# Altium PCB 基于STM32的DDS信号源的设计实例.PcbDoc
Units mm, origin at the board's own origin, x right, y up, seen from the top; angles counter-clockwise.
Board outline 100 x 70 mm, 2 copper layers (Top Layer, Bottom Layer); 59 components, 57 nets, 247 pads, 23 vias.
Unrouted connection lines stored in the file: 1.
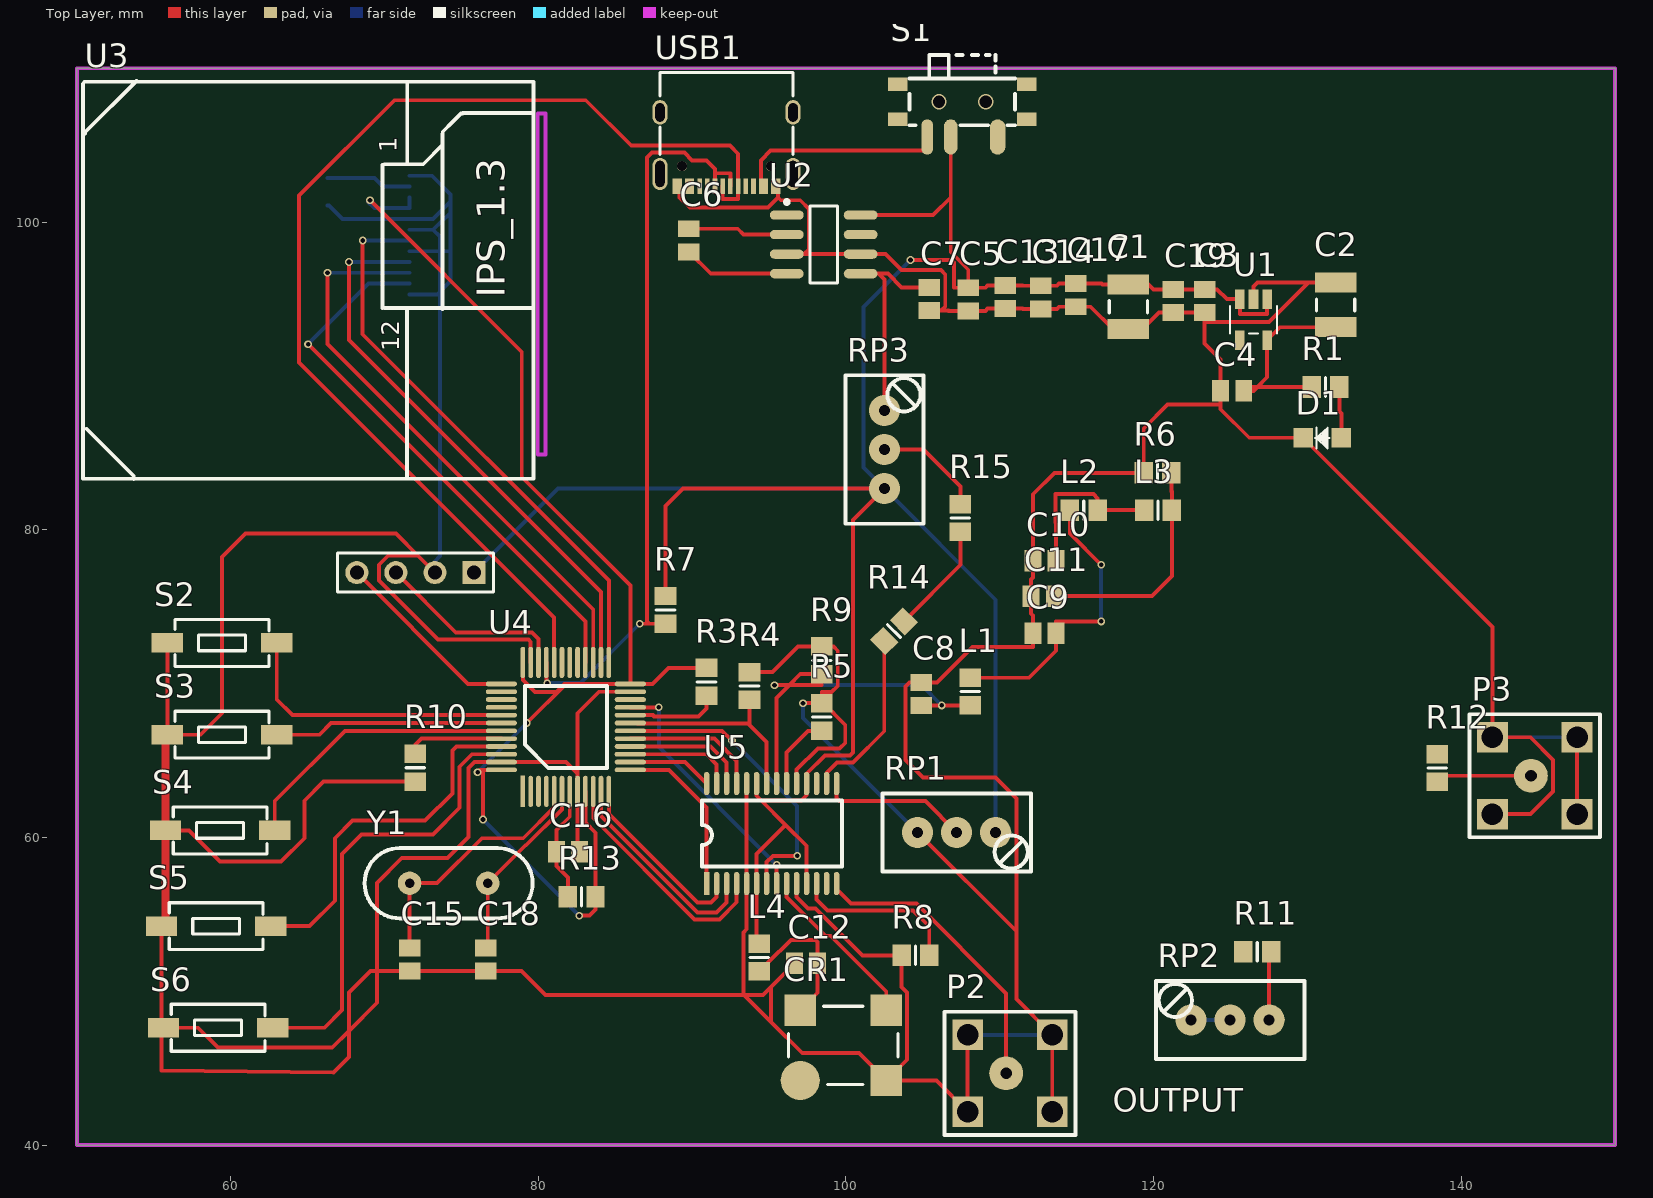
[diagram p0: Top Layer view]
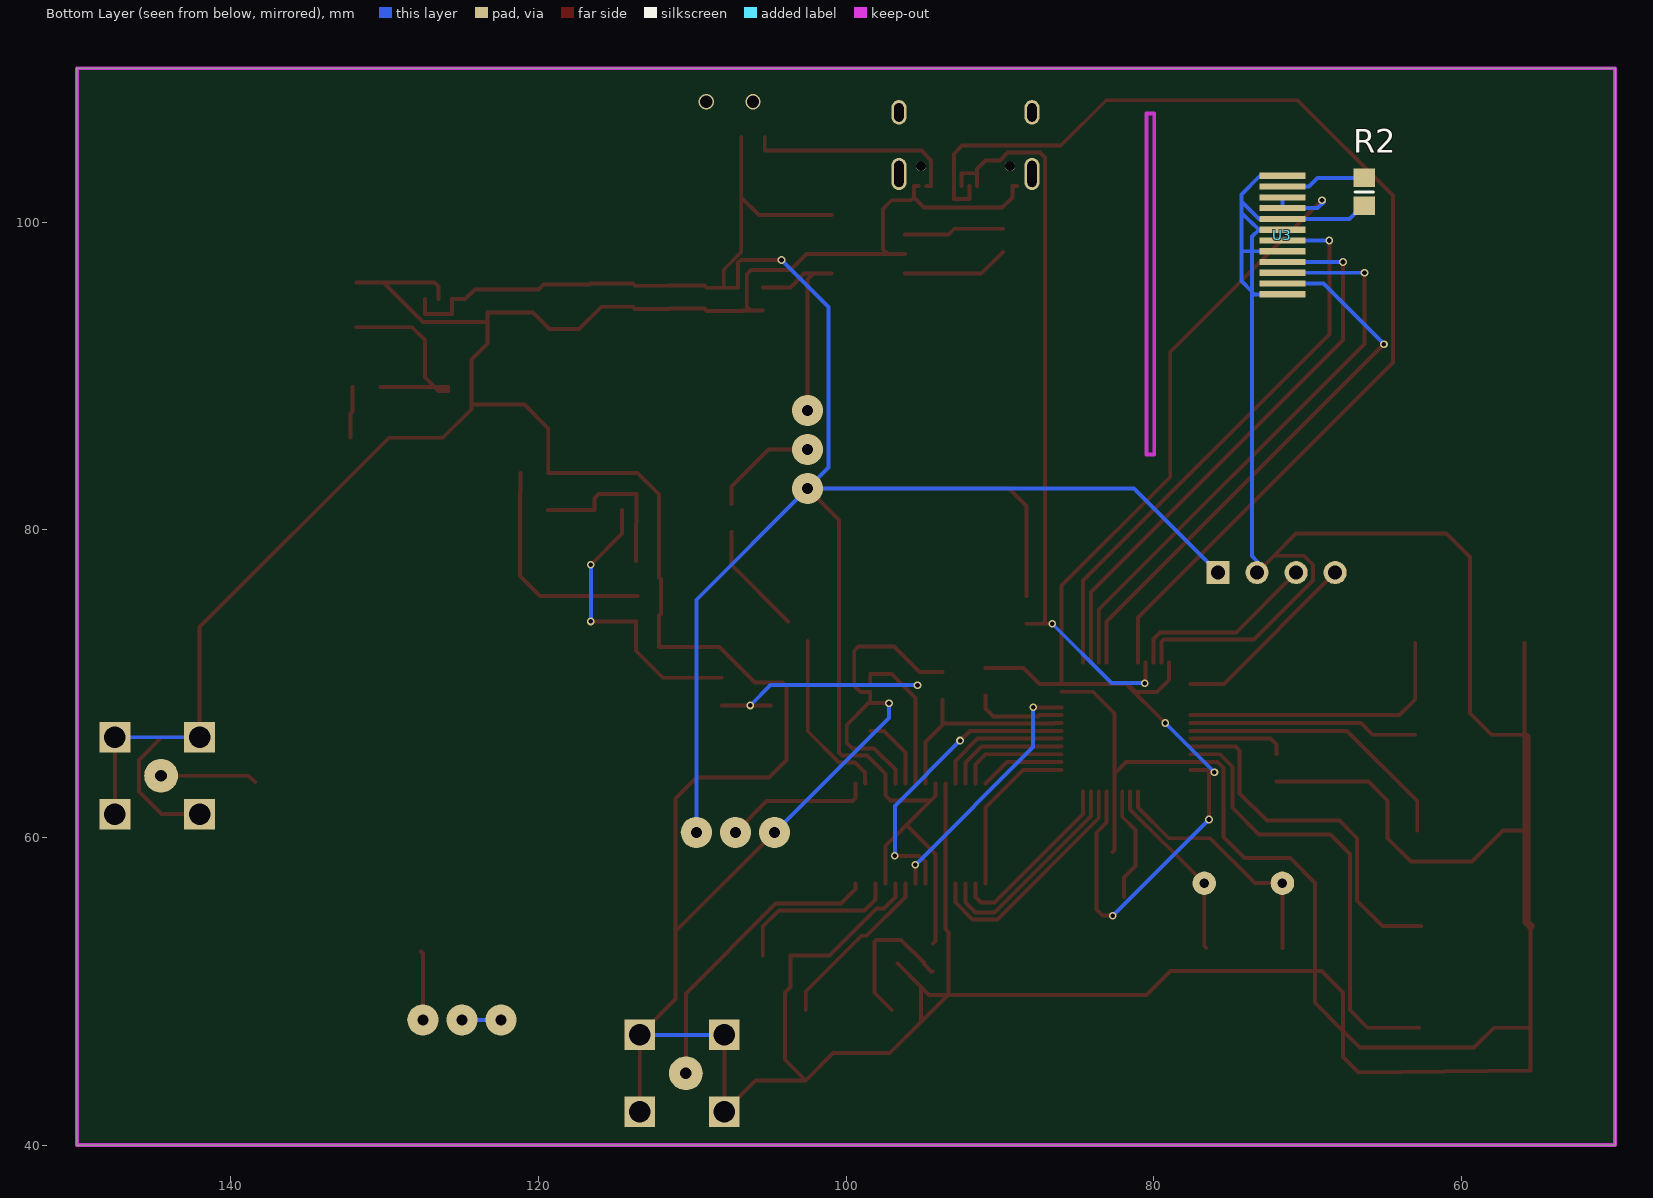
[diagram p1: Bottom Layer view, seen from below]

## Layer stack, top to bottom
Top Solder: solder mask 0.0102, Solder Resist, Dk 3.5
Top Layer: signal copper 0.0356
Dielectric 1: dielectric 0.32, FR-4, Dk 4.8
Bottom Layer: signal copper 0.0356
Bottom Solder: solder mask 0.0102, Solder Resist, Dk 3.5

## Board outline
50,40 150,40 150,110 50,110

## Design rules (kind name [scope] priority, off if disabled: settings)
Clearance [All] p1: gap=0.203 ignorepadtopadclearanceinfootprint=TRUE
PolygonConnect [All] p1: connectstyle=Relief reliefconductorwidth=0.254 reliefentries=4 polygonreliefangle="90 Angle" airgapwidth=0.254
RoutingVias [All] p1: holewidth=0.3 width=0.5 viastyle="Through Hole" minholewidth=0.3 minwidth=0.5 maxholewidth=0.3 maxwidth=0.5
SolderMaskExpansion [All] p1: expansion=0.102 istentingtop=FALSE
Width [All] p1: maxlimit=2.54 minlimit=0.254 preferedwidth=0.254 minimp=50.000000 maximp=50.000000 favimp=50.000000
30 further rules are at their usual default settings.

## Components (designator, comment, footprint, x,y, rotation, side; value= is the part's Value field where it differs from the comment)
C1 "Cap Pol1" C1210_N 118.364,94.488 r270 top
C2 "Cap Pol1" C1210_N 131.826,94.615 r90 top
C3 "Cap" C0805 123.317,94.881 r90 top value=104
C4 "Cap" C0805 125.107,89.027 r0 top value=104
C5 "Cap" C0805 107.95,94.984 r90 top value=106
C6 "Cap" C0805 89.789,98.818 r90 top value=106
C7 "Cap" C0805 105.41,94.996 r90 top value=106
C8 "Cap" C0805 104.902,69.33 r270 top
C9 "Cap" C0805 112.903,73.279 r0 top
C10 "Cap" C0805 112.915,77.978 r0 top
C11 "Cap" C0805 112.788,75.692 r0 top
C12 "Cap" C0805 97.409,51.816 r180 top
C13 "Cap" C0805 110.363,95.123 r270 top
C14 "Cap" C0805 112.649,95.111 r270 top
C15 "Cap" C0805 71.628,52.058 r90 top
C16 "Cap" C0805 81.927,59.055 r180 top
C17 "Cap" C0805 114.935,95.25 r270 top
C18 "Cap" C0805 76.581,52.07 r90 top
C19 "Cap" C0805 121.285,94.869 r270 top
CR1 "30MHZ" CRYSTAL-SMT-5X7 97.028,44.196 r0 top
D1 "LED2" D0805+ 132.207,85.979 r180 top
L1 "Inductor" 6-0805_N 108.077,69.48 r90 top
L2 "Inductor" 6-0805_N 115.454,81.28 r0 top
L3 "Inductor" 6-0805_N 120.28,81.28 r0 top
L4 "Inductor" 6-0805_N 94.361,52.186 r90 top
P1 "Header 4" HDR1X4 75.819,77.216 r180 top
P2 "SMA" SMA-KE 110.411,44.664 r0 top
P3 "SMA" SMA-KE 144.526,64.008 r0 top
R1 "Res2" 6-0805_N 131.18,89.281 r180 top
R2 "Res2" 6-0805_N 66.294,101.97 r90 bottom
R3 "Res2" 6-0805_N 90.932,70.115 r90 top
R4 "Res2" 6-0805_N 93.726,69.85 r90 top
R5 "Res2" 6-0805_N 98.425,67.829 r270 top
R6 "Res2" 6-0805_N 120.258,83.693 r180 top
R7 "Res2" 6-0805_N 88.265,74.792 r270 top
R8 "Res2" 6-0805_N 104.51,52.324 r0 top
R9 "Res2" 6-0805_N 98.425,71.512 r90 top
R10 "Res2" 6-0805_N 72.009,64.527 r270 top
R11 "Res2" 6-0805_N 126.735,52.578 r0 top
R12 "Res2" 6-0805_N 138.43,64.505 r270 top
R13 "Res2" 6-0805_N 82.815,56.134 r0 top
R14 "Res2" 6-0805_N 103.125,73.407 r45 top
R15 "Res2" 6-0805_N 107.442,80.772 r270 top
RP1 "POT2" VR7 107.188,60.325 r0 top
RP2 "POT2" VR7 124.968,48.133 r180 top
RP3 "POT2" VR7 102.5,85.217 r90 top
S1 "SW SPDT" SW-SPDT-7P 105.283,105.537 r0 top
S2 "KEY" SW-MINI 56.388,72.644 r0 top
S3 "KEY" SW-MINI 56.388,66.675 r0 top
S4 "KEY" SW-MINI 56.261,60.452 r0 top
S5 "KEY" SW-MINI 56.007,54.229 r0 top
S6 "KEY" SW-MINI 56.134,47.625 r0 top
U1 "XC6219B332" SOT23-5L 126.492,94.996 r180 top
U2 "ICL7660" SO8_N 98.552,98.552 r0 top
U3 "1.3寸TFT液晶" 1.3-TFT-TPS 71.62,103.015 r0 top
U4 "STM32F103C8" TQFP-48 78.994,62.992 r90 top
U5 "AD9851" TSSOP28 90.939,57 r90 top
USB1 "TYPE-C" TYPE-C 87.908,107.132 r0 top
Y1 "XTAL" XTAL2 74.168,57.023 r180 top

## Footprints (in the part's own frame and the unit in brackets; to place one, negate y for a bottom-side part, rotate by r counter-clockwise, add the part's x,y. Pads: shape width x height; smd on the part's side, far side on the other; paste and mask are expansions set on the pad)
1.3-TFT-TPS [mm]
  rect 3x0.4 smd far side: 1(0,0) 2(0.008,-0.709) 3(0.008,-1.409) 4(0.008,-2.109) 5(0.008,-2.809) 6(0.008,-3.509) 7(0.008,-4.209) 8(0.008,-4.909) 9(0.008,-5.609) 10(0.008,-6.309) 11(0.008,-7.009) 12(0.008,-7.709)
  Keep-Out Layer lines w0.254: 8.339,-18.123 8.339,4.051 8.847,4.051 8.847,-18.123 8.339,-18.123
  silkscreen extent -21.22,-19.72 8.06,6.16
6-0805_N [mm]
  rect 1.2x1.4 smd: 1(-0.9,0) 2(0.9,0)
  silkscreen extent 0,-0.6 0,0.6, body extent -1.07,-0.7 1.07,0.7, height 0.7
C0805 [mm]
  rect 1.1x1.4 smd: 1(-0.75,0) 2(0.75,0)
  body extent -1.1,-0.73 1.1,0.73, height 1.4
C1210_N [mm]
  rect 1.3x2.7 smd: 1(-1.45,0) 2(1.45,0)
  silkscreen extent -0.4,-1.25 0.4,1.25, body extent -1.7,-1.35 1.7,1.35, height 1.5
CRYSTAL-SMT-5X7 [mil]
  round 100 smd: 1(0,0)
  rect 80x80 smd: 4(220,0) 5(220,180) 8(0,180)
  silkscreen extent -30,-10 250,190
D0805+ [mil]
  rect 50x50 smd: A(0,0) K(98,0)
  silkscreen extent 31,-27 68,27
HDR1X4 [mm]
  rect 1.5x1.5 hole 0.9: 1(0,0)
  round 1.5 hole 0.9: 2(2.54,0) 3(5.08,0) 4(7.62,0)
  silkscreen extent -1.27,-1.27 8.89,1.27
SMA-KE [mm]
  round 2.2 hole 0.762: 1(0,0)
  rect 2x2 hole 1.4: 2(3,2.5) 3(3,-2.5) 4(-2.5,-2.5) 5(-2.5,2.5)
  silkscreen extent -4,-4 4.5,4
SO8_N [mm]
  oval 2.2x0.6 smd: 1(-2.4,1.905) 2(-2.4,0.635) 3(-2.4,-0.635) 4(-2.4,-1.905) 5(2.4,-1.905) 6(2.4,-0.635) 7(2.4,0.635) 8(2.4,1.905)
  silkscreen extent -2.52,-2.5 0.9,2.88, body extent -2,-2.5 2,2.5, height 1.75
SOT23-5L [mil]
  rect 25x50 smd: 1(-35,0) 2(0,0) 3(35,0) 4(35,105) 5(-35,105)
  silkscreen extent -60,18 60,88
SW-MINI [mil]
  rect 80x50 smd: 1(-20,0) 2(260,0)
  silkscreen extent 0,-60 240,60
SW-SPDT-7P [mil]
  oval 30x90 smd: 1(0,0)
  oval 35x90 smd: 2(60,0)
  oval 40x90 smd: 3(180,0)
  rect 50x35 smd: 4(255,45) 5(255,135) 6(-75,135) 7(-75,45)
  silkscreen extent -45,30 225,210
TQFP-48 [mil]
  rect 80x12 smd: 1(0,0)
  oval 80x12 smd: 2(0,-20) 3(0,-40) 4(0,-60) 5(0,-80) 6(0,-100) 7(0,-120) 8(0,-140) 9(0,-160) 10(0,-180) 11(0,-200) 12(0,-220) 25(330,-220) 26(330,-200) 27(330,-180) 28(330,-160) 29(330,-140) 30(330,-120) 31(330,-100) 32(330,-80) 33(330,-60) 34(330,-40) 35(330,-20) 36(330,0)
  oval 12x80 smd: 13(55,-275) 14(75,-275) 15(95,-275) 16(115,-275) 17(135,-275) 18(155,-275) 19(175,-275) 20(195,-275) 21(215,-275) 22(235,-275) 23(255,-275) 24(275,-275) 37(275,55) 38(255,55) 39(235,55) 40(215,55) 41(195,55) 42(175,55) 43(155,55) 44(135,55) 45(115,55) 46(95,55) 47(75,55) 48(55,55)
  silkscreen extent 60,-215 270,-5
TSSOP28 [mm]
  rect 1.5x0.35 smd: 1(0,0)
  oval 1.5x0.35 smd: 2(0,-0.65) 3(0,-1.3) 4(0,-1.95) 5(0,-2.6) 6(0,-3.25) 7(0,-3.9) 8(0,-4.55) 9(0,-5.2) 10(0,-5.85) 11(0,-6.5) 12(0,-7.15) 13(0,-7.8) 14(0,-8.45) 15(6.5,-8.45) 16(6.5,-7.8) 17(6.5,-7.15) 18(6.5,-6.5) 19(6.5,-5.85) 20(6.5,-5.2) 21(6.5,-4.55) 22(6.5,-3.9) 23(6.5,-3.25) 24(6.5,-2.6) 25(6.5,-1.95) 26(6.5,-1.3) 27(6.5,-0.65) 28(6.5,0)
  silkscreen extent 1.1,-8.8 5.4,0.3
TYPE-C [mm]
  round 0.65 hole 0.65: 0(1.435,-3.5) 0(7.215,-3.5)
  oval 1x1.6 hole 0.6 slot 1.2 at 90 deg: 1(0,0) 2(8.65,0)
  oval 1x2.1 hole 0.6 slot 1.7 at 90 deg: 3(8.65,-4) 4(0,-4)
  rect 0.3x1 smd: A1(7.675,-4.79) A4(6.875,-4.79) A5(5.575,-4.79) A6(4.575,-4.79) A7(4.075,-4.79) A8(3.075,-4.79) A9(1.775,-4.79) A12(0.975,-4.79) B1(1.275,-4.79) B4(2.075,-4.79) B5(2.575,-4.79) B6(3.575,-4.79) B7(5.075,-4.79) B8(6.075,-4.79) B9(6.575,-4.79) B12(7.375,-4.79)
  silkscreen extent 0,-2.74 8.65,2.6
VR7 [mil]
  round 80 hole 28: 1(-100,0) 2(100,0) 3(0,0)
  silkscreen extent -190,-100 190,100
XTAL2 [mil]
  round 60 hole 24: 1(-100,0) 2(100,0)
  silkscreen extent -215,-90 215,90

## Part data
C1 C2: "Polarized Capacitor (Radial)", LatestRevisionDate=17-Jul-2002, LatestRevisionNote="Re-released for DXP Platform.", PackageDescription="Polarized Capacitor (Radial); 2 Leads", PackageReference=RB7.6-15, Published=8-Jun-2000, Publisher="Altium Limited"
C3 C4 C5 C6 C7 C8 C9 C10 C11 C12 C13 C14 C15 C16 C17 C18 C19: "Capacitor", LatestRevisionDate=17-Jul-2002, LatestRevisionNote="Re-released for DXP Platform.", PackageDescription="Radial Cap, Thru-Hole; 2 Leads; 0.3 in Pin Spacing", PackageReference=RAD-0.3, Published=8-Jun-2000, Publisher="Altium Limited"
CR1: library part CRYSTAL-DIP8
D1: "Typical RED, GREEN, YELLOW, AMBER GaAs LED", LatestRevisionDate=17-Jul-2002, LatestRevisionNote="Re-released for DXP Platform.", PackageDescription="SM LED; 2 Flat Leads", PackageReference=3.2X1.6X1.1, PackageVersion=Feb-2002, Published=8-Jun-2000, Publisher="Altium Limited"
P1: "Header, 4-Pin", LatestRevisionDate=17-Jul-2002, LatestRevisionNote="Re-released for DXP Platform.", Publisher="Altium Limited"
R1 R2 R3 R4 R5 R6 R7 R8 R9 R10 R11 R12 R13 R14 R15: "Resistor", LatestRevisionDate=17-Jul-2002, LatestRevisionNote="Re-released for DXP Platform.", PackageDescription="Axial Device, Thru-Hole; 2 Leads; 0.4 in Pin Spacing", PackageReference=AXIAL-0.4, Published=8-Jun-2000, Publisher="Altium Limited"
RP1 RP2 RP3: "Potentiometer"
S2 S3 S4 S5 S6: library part SW-PB, "Switch", LatestRevisionDate=17-Jul-2002, LatestRevisionNote="Re-released for DXP Platform.", PackageDescription="Switch; 2 Leads", PackageReference=SPST-2, Published=24-Mar-1999, Publisher="Altium Limited"
U1: library part XC6219
U4: "Flaah:64/RAM:20/IO:36", BOM名称=32位STM单片机, 学习资源=www.ooocke.com, 版权归属=源创客
Y1: "Crystal Oscillator", LatestRevisionDate=17-Jul-2002, LatestRevisionNote="Re-released for DXP Platform.", PackageDescription="Crystal, Thru-Hole; 2 Leads; Body 3.1 x 8.2 mm (Dia.xH)", PackageReference=R38, Published=8-Jun-2000, Publisher="Altium Limited"
L1 L2 L3 L4: Code_IEC=1005, Code_JEITA=0402, LatestRevisionDate=29-May-2009, LatestRevisionNote="IPC-7351 Footprint Added.", PackageDescription="Chip Inductor", PackageReference=0402-A, Published=8-Jun-2000, Publisher="Altium Limited"

## Via types
v1: diameter 0.5, hole 0.3, Top Layer to Bottom Layer, 21 vias
v2: diameter 1, hole 0.8, Top Layer to Bottom Layer, 2 vias

## Nets (pads, with @x,y where several pads share a name; then routed paths per layer and width w, separated by ;. In a path a pad name is that pad's centre, name@x,y a point inside that pad or via, vN(x,y) a via of type N, cw(c..) or ccw(c..) an arc to the next point about the centre after c; other vN are vias at no path point)
+5: C1.1 C3.2 C5.2 C13.1 C14.1 C17.1 C19.1 L4.2 P1.1 R7.1 RP1.2 RP3.1 S1.2 U1.1 U1.3 U2.8 U5.6 U5.11 U5.18 U5.23 | length 178
  Top Layer w0.254: R7.1 88.265,81.534 89.408,82.677 RP3.1 100.457,80.634 100.457,65.518 100.268,65.329 98.628,65.329 97.439,64.139 U5.18 97.439,62.738 97.109,62.408 94.488,62.408 ; U5.23 94.189,62.707 94.488,62.408 ; L4.2 94.189,53.258 U5.6 94.189,58.928 96.078,60.817 ; U5.11 97.439,59.457 96.078,60.817 ; U2.8 105.664,100.457 106.807,101.6 ; v1(104.191,97.536) 106.839,97.536 107.01,97.365 107.01,95.734 C5.2 ; S1.2 106.807,101.6 ; U1.1 127.381,94.031 125.603,94.031 U1.3 124.765,94.996 124.13,95.631 C3.2 122.288,95.631 122.276,95.619 C19.1 119.978,95.619 119.659,95.938 C1.1 116.673,95.938 116.611,96 C17.1 113.855,96 113.716,95.861 C14.1 111.493,95.861 111.481,95.873 C13.1 109.207,95.873 109.068,95.734 C5.2 ; 94.488,62.408 96.078,60.817 ; 106.807,101.6 106.807,98.044 107.95,96.901 C5.2
  Bottom Layer w0.254: P1.1 81.28,82.677 RP3.1 ; v1(104.191,97.536) 101.143,94.488 101.143,84.034 RP3.1 ; RP1.2 109.728,75.449 RP3.1
+5VIN: S1.1 USB1.A4 USB1.A9 USB1.B9 | length 14
  Top Layer w0.254: USB1.A4 USB1.B9 94.483,103.027 94.463,103.048 94.463,104.013 95.098,104.648 105.283,104.648 S1.1
-5: C7.2 RP3.2 U2.5 | length 13.9
  Top Layer w0.254: U2.5 102.119,96.647 ; RP3.2 102.5,96.266 102.119,96.647 ; C7.2 103.619,95.746 102.718,96.647 102.119,96.647
AD985-D0: U4.10 U5.4 | length 15.5
  Top Layer w0.254: U4.10 83.566,61.257 90.162,54.661 91.768,54.661 92.889,55.782 U5.4
AD985-D1: U4.11 U5.3 | length 13.9
  Top Layer w0.254: U4.11 84.074,61.395 90.351,55.118 91.579,55.118 92.239,55.778 U5.3
AD985-D2: U4.12 U5.2 | length 11.9
  Top Layer w0.254: U4.12 84.582,61.534 90.341,55.775 91.23,55.775 91.589,56.134 U5.2
AD985-D3: U4.13 U5.1 | length 10.9
  Top Layer w0.254: U4.13 88.494,64.389 90.939,61.944 U5.1
AD985-D4: U4.14 U5.28 | length 5.5
  Top Layer w0.254: U4.14 89.542,64.897 U5.28
AD985-D5: U4.15 U5.27 | length 7.1
  Top Layer w0.254: U4.15 90.932,65.405 91.589,64.748 U5.27
AD985-D6: U4.16 U5.26 | length 8.1
  Top Layer w0.254: U4.16 91.186,65.913 92.239,64.86 U5.26
AD985-D7: U4.17 U5.25 | length 9
  Top Layer w0.254: U4.17 91.44,66.421 92.889,64.972 U5.25
D/C: U3.7 U4.25 | length 37.1
  Top Layer w0.254: v1(68.58,98.806) 68.58,92.71 84.582,76.708 U4.25
  Bottom Layer w0.254: v1(68.58,98.806) U3.7
D\D\S\R\S\T\: R4.1 U4.19 U5.22 | length 13.7
  Top Layer w0.254: U4.19 86.443,67.437 86.443,67.412 93.624,67.412 93.726,67.31 ; R4.1 93.726,67.31 ; U5.22 94.839,66.197 93.726,67.31
DDSFQUP: U4.21 U5.8 | length 16.5
  Top Layer w0.254: U4.21 v1(87.833,68.453) ; U5.8 v1(95.489,58.217)
  Bottom Layer w0.254: v1(87.833,68.453) 87.833,65.873 v1(95.489,58.217)
DDSWCLK: U4.18 U5.7 | length 19.7
  Top Layer w0.254: U4.18 91.948,66.929 v1(92.583,66.294) ; U5.7 94.839,58.39 95.25,58.801 v1(96.825,58.801)
  Bottom Layer w0.254: v1(92.583,66.294) 96.825,62.052 v1(96.825,58.801)
FOUT: R14.1 U5.16 | length 11.4
  Top Layer w0.254: U5.16 98.757,63.518 98.757,64.213 99.416,64.872 100.457,64.872 102.489,66.904 R14.1
GND: C1.2 C2.2 C3.1 C4.1 C5.1 C7.1 C8.1 C9.1 C10.1 C11.1 C12.2 C13.2 C14.2 C15.1 C16.1 C17.2 C18.1 C19.2 CR1.4 D1.K P1.2 P2.2 P2.3 P2.4 P2.5 P3.2 P3.3 P3.4 P3.5 R2.1 R4.2 R5.1 R6.2 R8.1 R9.2 R10.2 RP1.1 S2.1 S3.1 S4.1 S5.1 S6.1 U1.2 U2.3 U2.6 U3.1 U3.5 U3.6 U3.8 U3.12 U4.8 U4.23 U4.35 U4.47 U5.5 U5.10 U5.19 U5.24 USB1.A1 USB1.A12 USB1.B1 USB1.B12 | length 541
  Top Layer w0.254: S5.1 S6.1@55.499,47.752 ; S4.1 57.277,60.452 59.309,58.42 63.271,58.42 64.795,59.944 64.795,62.382 66.04,63.627 R10.2 ; S3.1@55.753,66.548 S3.1 ; S2.1 S3.1 ; P1.2 72.187,78.308 ; U4.35 79.502,72.72 79.355,72.867 73.488,72.867 69.647,76.708 69.647,77.724 70.231,78.308 72.187,78.308 ; C16.1 82.55,59.182 U4.8 82.55,64.135 ; U4.23 83.947,69.469 82.55,68.072 82.55,64.135 ; USB1.A12 USB1.B1 89.183,101.6 89.843,100.94 94.923,100.94 95.583,101.6 ; U5.24 U5.5 93.539,54.031 93.331,53.823 93.331,49.798 93.37,49.759 ; R4.2 95.225,70.75 96.887,72.412 R9.2 99.19,72.412 99.466,72.136 99.466,69.85 99.06,69.444 98.425,69.444 R5.1 ; USB1.B12 USB1.A1 95.583,101.6 ; U2.3 97.282,97.917 ; C12.2 95.123,50.28 ; U5.10 96.789,56.131 97.542,55.378 98.027,55.378 101.08,52.324 R8.1 103.61,50.273 103.962,49.921 103.962,45.542 CR1.4 ; U5.19 96.789,64.404 98.171,65.786 99.587,65.786 99.949,66.148 99.949,67.305 98.525,68.729 R5.1 ; v1(97.206,68.729) R5.1 ; RP1.1 111.074,53.899 ; C7.1 106.172,94.246 ; P2.5 P2.4 105.879,44.196 CR1.4 ; P2.3 P2.2 111.074,49.501 111.074,53.899 ; U1.2 126.492,95.811 126.746,96.065 130.076,96.065 ; C2.2 130.076,96.065 ; P3.4 144.49,61.508 145.974,62.992 145.974,65.024 144.49,66.508 P3.5 142.026,73.671 D1.K 126.213,85.979 124.357,87.835 124.357,88.138 ; P3.3 P3.2 ; S6.1@55.499,47.752 55.499,44.853 66.675,44.704 67.691,45.72 67.691,47.422 ; S6.1@55.499,47.752 S6.1 57.887,47.625 59.182,46.33 66.599,46.33 67.691,47.422 ; S3.1 58.039,66.675 59.436,68.072 59.436,78.232 60.96,79.756 70.739,79.756 72.187,78.308 ; 67.691,47.422 69.52,49.251 69.52,51.308 ; 67.691,47.422 67.691,49.911 69.088,51.308 69.52,51.308 ; 69.52,51.308 C15.1 71.64,51.32 C18.1 78.906,51.32 80.467,49.759 93.37,49.759 ; 69.52,51.308 69.52,57.048 71.12,58.649 74.092,58.649 75.467,60.024 75.467,64.52 75.844,64.897 U4.47 81.788,64.897 82.55,64.135 ; 93.37,49.759 95.123,48.006 ; 93.37,49.759 94.602,49.759 95.123,50.28 ; 95.123,48.006 97.155,45.974 100.838,45.974 CR1.4 ; 95.123,48.006 95.123,50.28 ; 95.583,101.6 95.761,101.422 97.028,101.422 97.587,100.863 97.587,98.222 97.282,97.917 ; 97.282,97.917 U2.6 102.565,97.917 103.607,96.876 106.172,96.876 106.451,96.596 106.451,94.525 106.172,94.246 ; 106.172,94.246 106.655,94.246 106.667,94.234 C5.1 109.068,94.234 109.207,94.373 C13.2 111.481,94.373 111.493,94.361 C14.2 113.716,94.361 113.855,94.5 C17.2 115.9,94.5 117.362,93.038 C1.2 119.278,93.038 120.359,94.119 C19.2 122.276,94.119 122.288,94.131 C3.1 123.317,93.497 ; 111.074,53.899 111.074,62.535 109.728,63.881 105.004,63.881 103.861,65.024 103.861,69.801 104.14,70.08 C8.1 105.918,70.08 108.215,72.377 112.153,72.377 C9.1 112.153,74.422 112.038,74.537 C11.1 112.038,76.759 112.165,76.886 C10.1 112.165,82.306 113.552,83.693 R6.2 119.358,86.592 120.904,88.138 124.357,88.138 ; 123.317,93.497 123.317,92.099 124.357,91.059 C4.1 124.357,88.138 ; 123.317,93.497 127.508,93.497 130.076,96.065
  Top Layer w0.508: S5.1 55.753,54.483 S4.1 S3.1@55.753,66.548
  Bottom Layer w0.254: R2.1 66.394,101.07 67.258,100.206 U3.5 73.152,100.206 74.295,101.349 ; U3.1 73.086,103.015 74.295,101.806 74.295,101.349 ; U3.12 73.44,95.306 73.609,95.475 ; U3.8 73.609,98.106 ; U3.6 73.163,99.506 ; P1.2 73.279,77.953 73.609,78.283 73.609,95.475 ; v1(97.206,68.729) 97.206,67.767 RP1.1 ; P2.5 P2.2 ; P3.5 P3.2 ; 73.163,99.506 74.295,100.584 ; 73.163,99.506 73.609,99.06 73.609,98.106 ; 73.609,95.475 73.609,98.106 ; 73.609,95.475 74.295,96.161 74.295,98.171 ; 73.609,98.106 74.23,98.106 74.295,98.171 ; 74.295,98.171 74.295,100.584 ; 74.295,100.584 74.295,101.349
IOUTA: C8.2 L1.1 R9.1 U5.21 | length 27.5
  Top Layer w0.254: v1(95.352,69.901) 96.317,69.901 ; U5.21 95.489,69.073 96.317,69.901 ; C8.2 v1(106.223,68.58) L1.1 ; 96.317,69.901 98.425,69.901 R9.1 97.028,70.612 96.317,69.901
  Bottom Layer w0.254: v1(95.352,69.901) 104.902,69.901 v1(106.223,68.58)
KEY1: S2.2 U4.41 | length 18.7
  Top Layer w0.254: S2.2 62.992,68.961 64.008,67.945 U4.41
KEY2: S3.2 U4.42 | length 14.9
  Top Layer w0.254: S3.2 65.761,66.675 66.523,67.437 U4.42
KEY3: S4.2 U4.43 | length 18.5
  Top Layer w0.254: S4.2 62.865,62.357 67.437,66.929 U4.43
KEY4: S5.2 U4.45 | length 23.8
  Top Layer w0.254: S5.2 65.126,54.229 66.777,55.88 66.777,59.944 67.92,61.087 72.644,61.087 74.422,62.865 74.422,65.659 74.676,65.913 U4.45
KEY5: S6.2 U4.46 | length 29.7
  Top Layer w0.254: S6.2 66.091,47.625 67.234,48.768 67.234,58.928 68.504,60.198 73.152,60.198 74.879,61.925 74.879,64.592 75.692,65.405 U4.46
NetC2_1: C2.1 C4.2 R1.2 U1.5 | length 13.8
  Top Layer w0.254: R1.2 126.746,89.281 ; C2.1 128.217,93.165 U1.5 127.381,89.916 126.746,89.281 ; 126.746,89.281 125.857,89.281 C4.2 126.492,89.027 126.746,89.281
NetC6_1: C6.1 U2.4 | length 7
  Top Layer w0.254: C6.1 91.21,96.647 U2.4
NetC6_2: C6.2 U2.2 | length 6.5
  Top Layer w0.254: C6.2 92.964,99.568 93.345,99.187 U2.2
NetC9_2: C9.2 L1.2 L2.1 | length 19.2
  Top Layer w0.254: L1.2 111.897,70.38 113.653,72.136 C9.2 113.653,74.041 v1(116.586,74.041) ; L2.1 114.554,79.756 v1(116.586,77.724)
  Bottom Layer w0.254: v1(116.586,74.041) v1(116.586,77.724)
NetC10_2: C10.2 L2.2 L3.1 | length 11
  Top Layer w0.254: C10.2 113.665,80.416 113.614,80.467 113.614,82.321 116.078,82.321 116.357,82.042 L2.2@116.357,81.28 ; L2.2 L2.2@116.357,81.28 ; L3.1 L2.2@116.357,81.28
NetC11_2: C11.2 L3.2 R6.1 | length 14.9
  Top Layer w0.254: C11.2 119.888,75.692 121.18,76.984 L3.2 121.18,82.474 121.158,82.496 R6.1
NetC12_1: C12.1 CR1.8 L4.1 | length 9.7
  Top Layer w0.254: L4.1 94.461,51.286 94.934,51.759 94.934,51.859 96.415,53.34 98.01,53.34 98.159,53.191 C12.1 98.159,49.899 CR1.8
NetD1_A: D1.A R1.1 | length 3.4
  Top Layer w0.254: R1.1 132.08,87.681 132.207,87.554 D1.A
NetP2_1: P2.1 U5.14 | length 19.4
  Top Layer w0.254: U5.14 99.389,56.637 100.324,55.702 104.572,55.702 110.411,49.863 P2.1
NetP3_1: P3.1 R12.2 | length 6.3
  Top Layer w0.254: R12.2 138.833,64.008 P3.1
NetR2_2: R2.2 U3.2 | length 5.6
  Bottom Layer w0.254: R2.2 69.342,102.87 69.906,102.306 U3.2
NetR3_1: R3.1 U4.20 | length 6
  Top Layer w0.254: U4.20 87.452,67.945 87.528,67.869 90.424,67.869 90.932,68.377 R3.1
NetR5_2: R5.2 U5.20 | length 4.9
  Top Layer w0.254: U5.20 96.139,65.532 97.536,66.929 R5.2
NetR8_2: R8.2 U5.12 | length 11
  Top Layer w0.254: U5.12 98.089,55.962 98.806,55.245 104.369,55.245 105.41,54.204 R8.2
NetR10_1: R10.1 U4.44 | length 6.4
  Top Layer w0.254: R10.1 72.009,66.04 72.39,66.421 U4.44
NetR11_1: R11.1
NetR11_2: R11.2 RP2.1 | length 4.5
  Top Layer w0.254: RP2.1 127.508,52.451 R11.2
NetR12_1: R12.1
NetR14_2: R14.2 R15.2 | length 7.4
  Top Layer w0.254: R14.2 107.442,77.724 R15.2
NetR15_1: R15.1 RP3.3 | length 7.1
  Top Layer w0.254: RP3.3 105.029,85.217 107.442,82.804 R15.1
NetRP1_3: RP1.3 U5.15 | length 9.7
  Top Layer w0.254: U5.15 99.389,62.558 99.59,62.357 105.156,62.357 RP1.3
NetRP2_2: RP2.2 RP2.3 | length 2.5
  Bottom Layer w0.254: RP2.2 RP2.3
NRST: C16.2 R13.1 U4.7 | length 7.5
  Top Layer w0.254: R13.1 81.915,57.404 81.177,58.142 C16.2 81.177,60.476 82.042,61.341 U4.7
OSC-IN: C15.2 U4.5 Y1.2 | length 16.7
  Top Layer w0.254: C15.2 Y1.2 73.406,57.023 76.327,59.944 79.016,59.944 81.026,61.954 U4.5
OSC-OUT: C18.2 U4.6 Y1.1 | length 12.2
  Top Layer w0.254: C18.2 76.708,52.947 Y1.1 79.172,59.487 79.205,59.487 81.534,61.815 U4.6
R\E\S\: U3.11 U4.28 | length 36.4
  Top Layer w0.254: v1(65.03,92.069) 83.058,74.041 U4.28
  Bottom Layer w0.254: v1(65.03,92.069) 68.967,96.006 U3.11
SCL: U3.9 U4.26 | length 36.8
  Top Layer w0.254: v1(67.691,97.409) 67.691,92.329 84.074,75.946 U4.26
  Bottom Layer w0.254: v1(67.691,97.409) 67.694,97.406 U3.9
SCLK: P1.4 U4.37 | length 12.4
  Top Layer w0.254: P1.4 75.438,69.977 U4.37
SDA: U3.10 U4.27 | length 37.8
  Top Layer w0.254: v1(66.294,96.706) 66.294,92.075 83.566,74.803 U4.27
  Bottom Layer w0.254: v1(66.294,96.706) U3.10
SDIO: P1.3 U4.34 | length 12.6
  Top Layer w0.254: P1.3 74.631,73.324 79.584,73.324 80.01,72.898 U4.34
SYSCLK: CR1.5 U5.9 | length 11.1
  Top Layer w0.254: U5.9 96.139,56.134 98.665,53.608 98.985,53.608 102.616,49.977 CR1.5
USB-D-N: U4.32 USB1.A7 USB1.B7 | length 74.6
  Top Layer w0.254: U4.32 81.026,74.295 64.44,90.881 64.44,101.727 70.637,107.925 83.083,107.925 86.039,104.969 92.458,104.969 92.983,104.445 USB1.B7 92.983,101.498 91.983,101.498 USB1.A7
USB-D-P: R7.2 U4.33 USB1.A6 USB1.B6 | length 49
  Top Layer w0.254: U4.33 80.518,70.079 v1(80.569,70.028) ; v1(86.592,73.892) 87.224,73.892 ; R7.2 87.224,73.892 ; USB1.B6 91.483,103.175 ; USB1.A6 92.483,103.175 91.483,103.175 ; 87.224,73.892 87.071,74.044 87.071,104.207 87.376,104.512 89.493,104.512 89.992,104.013 90.932,104.013 91.483,103.462 91.483,103.175
  Bottom Layer w0.254: v1(80.569,70.028) 82.728,70.028 v1(86.592,73.892)
VCC: R3.2 R13.2 U3.3 U3.4 U4.9 U4.24 U4.36 U4.48 | length 87.2
  Top Layer w0.254: v1(69.054,101.431) 78.918,91.567 78.918,83.439 85.979,76.378 U4.24 ; v1(76.048,64.237) 76.2,64.389 76.403,64.389 ; v1(76.403,61.163) 76.403,64.389 ; U4.48 76.403,64.389 ; U4.36 78.994,70.231 79.777,69.448 81.17,69.448 81.7,69.977 81.788,69.977 ; v1(79.248,67.437) 81.788,69.977 ; v1(82.652,54.915) 83.312,54.915 83.715,55.318 R13.2 83.715,60.303 83.058,60.96 U4.9 ; R3.2 88.468,71.015 87.43,69.977 U4.24 ; 81.788,69.977 U4.24
  Bottom Layer w0.254: v1(69.054,101.431) 68.936,101.312 69.342,100.906 U3.4 U3.3 ; v1(76.048,64.237) v1(79.248,67.437) ; v1(76.403,61.163) v1(82.652,54.915)
pads on no net: CR1.1 S1.3 S1.4 S1.5 S1.6 S1.7 U1.4 U2.1 U2.7 U4.1 U4.2 U4.3 U4.4 U4.22 U4.29 U4.30 U4.31 U4.38 U4.39 U4.40 U5.13 U5.17 USB1.0 USB1.1 USB1.2 USB1.3 USB1.4 USB1.A5 USB1.A8 USB1.B4 USB1.B5 USB1.B8
copper on no net:
  other v2: 106.045,107.823 109.093,107.823

## Keep-outs
Keep-Out Layer:
  the board outline again, w0.254

## Silkscreen, mask and mechanical layers (free items; w line width, h text height)
Top Overlay:
  text "OUTPUT" at 117.348,42.164 h1.52

## Dimensions
35,110 to 35,40 on Top Layer
50,125 to 150,125 on Top Layer

## Text inside footprints (layer, text, board x,y; h text height)
U3: Top Overlay "12" at 70.968,91.598 h1.14 r90; Top Overlay "1" at 70.79,104.526 h1.14 r90; Top Overlay "IPS_1.3" at 77.8,95.077 h1.82 r90